# Altium PCB Grabber.PCBDOC (part 5 of 5)
Units mil, origin at the board's own origin, x right, y up, seen from the top; angles counter-clockwise.
Board outline 2854.33 x 3937 mil, 4 copper layers (TopLayer, Internal Plane 2, Layer 1, Bottom Layer), stack 60.752 mil thick; 159 components, 116 nets, 684 pads, 241 vias.
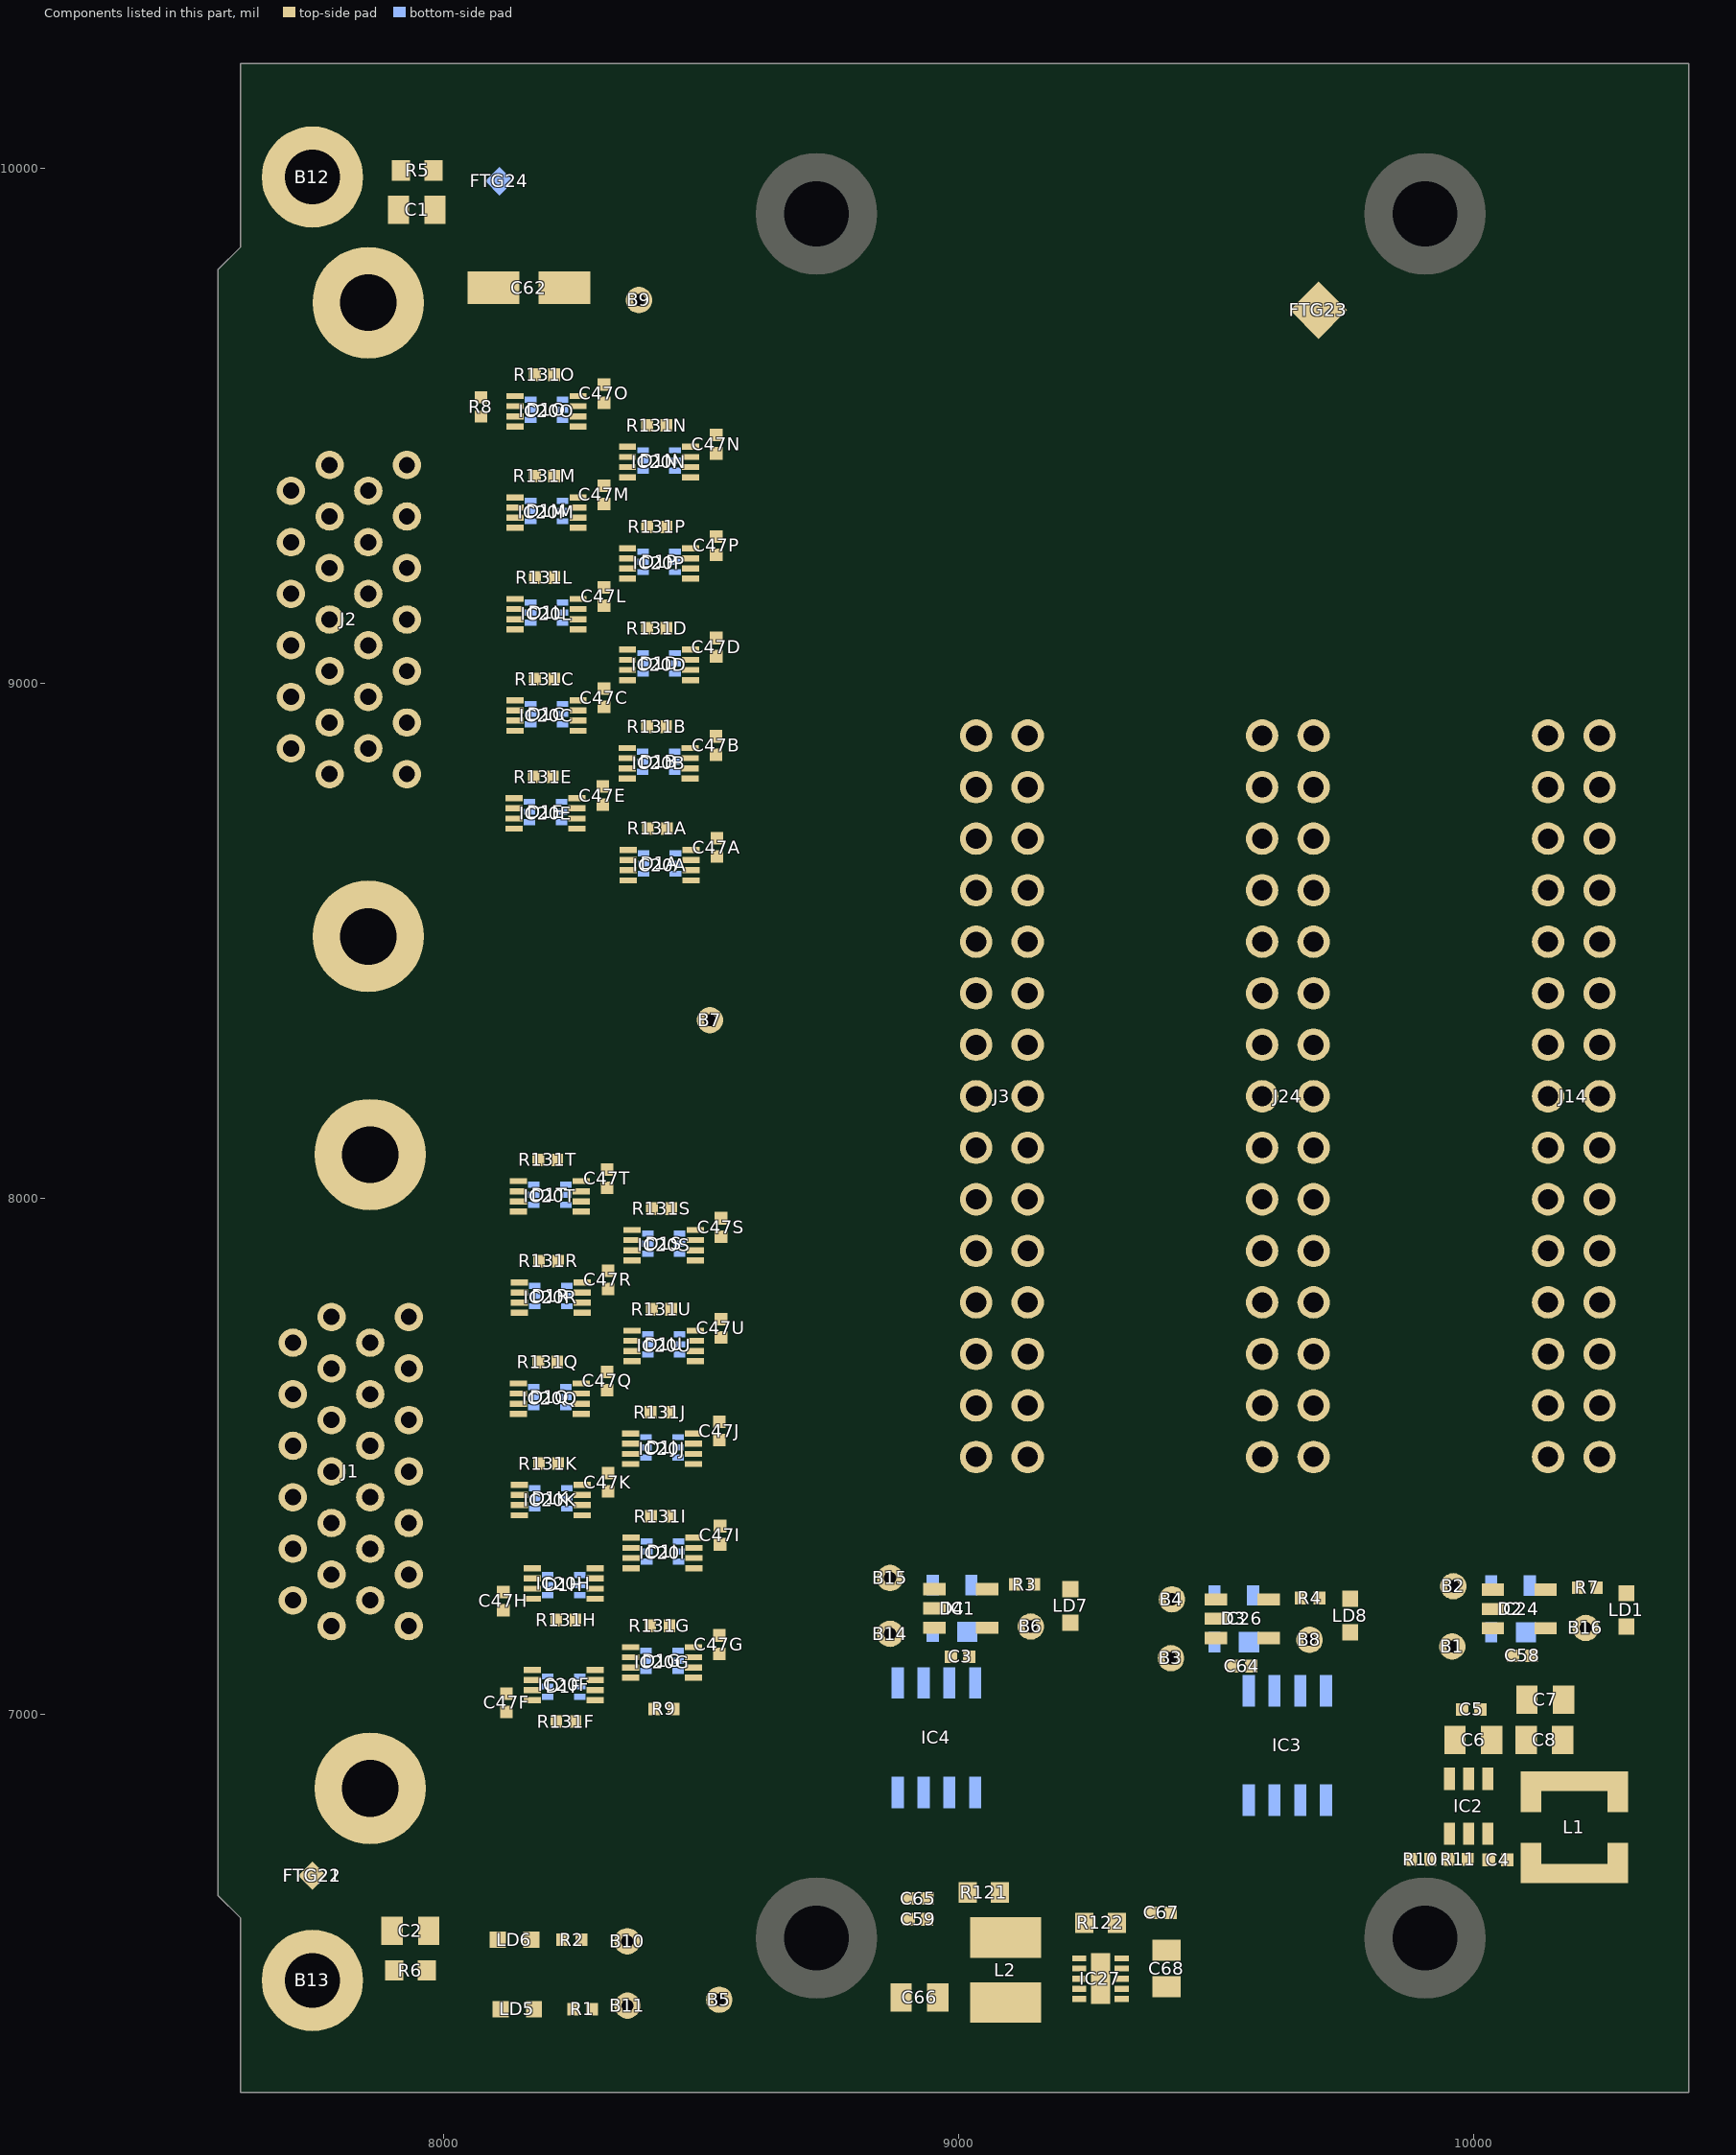
[diagram p6: the components of this part, seen from the top]

## Keep-outs
TopLayer:
  lines w3.94: 7562.69,6585 7655,6585 7674.58,6604.58 7822.23,6604.58 7856,6570.8 ; 7634.23,9885 7667,9885 7686,9866 7806,9866 7846,9906 ; 7846,6385 7846,6426 7859.67,6439.67 7859.67,6490.41 ; 7846,10085 7846,10045.55 7865.53,10026.02 7865.53,10006
Bottom Layer:
  lines w3.94: 7562.69,6585 7655,6585 7674.58,6604.58 7822.23,6604.58 7859.67,6567.13 7859.67,6439.67 7846,6426 7846,6385 ; 7634.23,9885 7667,9885 7686,9866 7806,9866 7865.53,9925.53 7865.53,10026.02 7846,10045.55 7846,10085
KeepOutLayer:
  lines w8: 7562.69,6585 7562.69,9885 ; 7846,6385 10377.65,6385 10377.65,10085 7846,10085

## Other copper
TopLayer:
  rectangle net P3V3: 10288,6856 10324,6882
  rectangle net P3V3: 10183,6882 10210,6904
  rectangle net P12V0: 9842,6918 9894,6995
  rectangle net P12V0: 9865,7525 9937,7618
Bottom Layer:
  rectangle net P12V0: 9842,6918 9894,6995
  rectangle net P12V0: 9865,7525 9937,7618

## Silkscreen, mask and mechanical layers (free items; w line width, h text height)
TopOverlay:
  drawing of 1239 lines, arcs and shapes, not listed
  text "Grabber  v1.1.2" at 8346,10055 h60
  text "GND" at 8445.29,9726.1 h39.37
  text "Y0" at 8160.53,9617.46 h39.37
  text "Y1" at 8388.28,9520.33 h39.37
  text "Y2" at 8160.53,9420.88 h39.37
  text "YCLK" at 8349,9331 h39.37
  text "Y3" at 8160.53,9223.76 h39.37
  text "EEM1" at 9539.07,9137.73 h60
  text "EEM0" at 10088.5,9124.94 h60
  text "EEM2" at 8960.33,9121.98 h60
  text "Z0" at 8374,9118.05 h40
  text "Z1" at 8160.53,9026.91 h40
  text "Z2" at 8378.05,8934.39 h40
  text "ZCLK" at 8114.49,8833.77 h40
  text "Z3" at 8379.43,8736.59 h40
  text "GND" at 8606,8327.02 h39.37
  text "X0" at 8177.06,8095 h39.37
  text "X1" at 8401,8002 h39.37
  text "X2" at 8172,7898 h39.37
  text "XCK" at 8387.7,7803.48 h39.37
  text "LVDS CH0...7 EEM-0" at 10022,7714 h40 r90
  text "X3" at 8166.83,7701.12 h39.37
  text "LVDS CH8...15 EEM-1" at 9449,7701 h40 r90
  text "LVDS CH16...23 EEM-2" at 8888,7694 h40 r90
  text "SERTX" at 8461.12,7596 h39.37
  text "SERRX" at 8079.93,7507 h39.37
  text "CC0" at 8375,7400 h39.37
  text "CC2" at 8371.36,7189.31 h39.37
  text "CC1" at 8194,7124.23 h39.37
  text "MP2" at 9153,7079 h39.37
  text "MP0" at 10210,7073 h39.37
  text "MP1" at 9695,7060 h39.37
  text "CC3" at 8184,6923 h39.37
  text "3.3V" at 8158.95,6606 h39.37
  text "+3.3" at 8409.74,6562 h40
  text "M1" at 8046,6525.84 h39.37 r90
  text "12V" at 8185,6459 h39.37
  text "M2" at 8046,6436 h39.37 r90
  text "12V" at 8319.39,6348.68 h39.37
  text "GND" at 8489.3,6348.68 h39.37
Bottom Overlay:
  text "Grabber  v1.1.2" at 9374,10058 h60
Mechanical1:
  drawing of 303 lines, arcs and shapes, not listed
  text "Layer" at 10850.23,9072 h60
  text "Name" at 11260.14,9072 h60
  text "Material" at 12299.85,9072 h60
  text "Thickness" at 13159.62,9072 h60
  text "Constant" at 13809.46,9072 h60
  text "Board Layer Stack" at 14379.32,9072 h60
  text "TopOverlay" at 11260.14,8952 h60
  text "TopSolder" at 11260.14,8832 h60
  text "Solder Resist" at 12299.85,8832 h60
  text "0,053mm" at 13159.62,8832 h60
  text "3.5" at 13809.46,8832 h60
  text "1" at 10850.23,8712 h60
  text "TopLayer" at 11260.14,8712 h60
  text "0,036mm" at 13159.62,8712 h60
  text "Dielectric1" at 11260.14,8592 h60
  text "FR-4" at 12299.85,8592 h60
  text "0,200mm" at 13159.62,8592 h60
  text "4.5" at 13809.46,8592 h60
  text "2" at 10850.23,8472 h60
  text "Internal Plane 2" at 11260.14,8472 h60
  text "0,036mm" at 13159.62,8472 h60
  text "Dielectric 4" at 11260.14,8352 h60
  text "1,000mm" at 13159.62,8352 h60
  text "4.5" at 13809.46,8352 h60
  text "3" at 10850.23,8232 h60
  text "Layer 1" at 11260.14,8232 h60
  text "0,036mm" at 13159.62,8232 h60
  text "Dielectric 1" at 11260.14,8112 h60
  text "FR-4" at 12299.85,8112 h60
  text "0,200mm" at 13159.62,8112 h60
  text "4.5" at 13809.46,8112 h60
  text "4" at 10850.23,7992 h60
  text "Bottom Layer" at 11260.14,7992 h60
  text "0,036mm" at 13159.62,7992 h60
  text "Bottom Solder" at 11260.14,7872 h60
  text "Solder Resist" at 12299.85,7872 h60
  text "0,053mm" at 13159.62,7872 h60
  text "3.5" at 13809.46,7872 h60
  text "Bottom Overlay" at 11260.14,7752 h60
Mechanical13:
  lines w3.94: 7505.84,6264.5 7505.84,10240.17

## Text inside footprints (layer, text, board x,y; h text height)
J1: TopOverlay "25" at 7727.22,7765.61 h40 r90; TopOverlay "12" at 7877.22,7770.53 h40 r90; TopOverlay "13" at 7952.22,7820.92 h40 r90; TopOverlay "26" at 7802.22,7816 h40 r90; TopOverlay "14" at 7802.02,7071.51 h40 r90; TopOverlay "15" at 7727.02,7115.61 h40 r90; TopOverlay "2" at 7877.02,7143.17 h40 r90; TopOverlay "1" at 7952.02,7108.91 h40 r90; Mechanical14 "25" at 7727.22,7765.61 h40 r90; Mechanical14 "12" at 7877.22,7770.53 h40 r90; Mechanical14 "13" at 7952.22,7820.92 h40 r90; Mechanical14 "26" at 7802.22,7816 h40 r90; Mechanical14 "14" at 7802.02,7071.51 h40 r90; Mechanical14 "15" at 7727.02,7115.61 h40 r90; Mechanical14 "2" at 7877.02,7143.17 h40 r90; Mechanical14 "1" at 7952.02,7108.91 h40 r90
J2: TopOverlay "25" at 7723.48,9419.15 h40 r90; TopOverlay "12" at 7873.48,9424.07 h40 r90; TopOverlay "13" at 7948.48,9474.46 h40 r90; TopOverlay "26" at 7798.48,9469.54 h40 r90; TopOverlay "14" at 7798.28,8725.06 h40 r90; TopOverlay "15" at 7723.28,8769.15 h40 r90; TopOverlay "2" at 7873.28,8796.71 h40 r90; TopOverlay "1" at 7948.28,8762.46 h40 r90; Mechanical14 "25" at 7723.48,9419.15 h40 r90; Mechanical14 "12" at 7873.48,9424.07 h40 r90; Mechanical14 "13" at 7948.48,9474.46 h40 r90; Mechanical14 "26" at 7798.48,9469.54 h40 r90; Mechanical14 "14" at 7798.28,8725.06 h40 r90; Mechanical14 "15" at 7723.28,8769.15 h40 r90; Mechanical14 "2" at 7873.28,8796.71 h40 r90; Mechanical14 "1" at 7948.28,8762.46 h40 r90
J3: TopOverlay "30" at 9189,7524 h40 r270; Mechanical14 "30" at 9189,7524 h40 r270
J14: TopOverlay "30" at 10299,7524 h40 r270; Mechanical14 "30" at 10299,7524 h40 r270
J24: TopOverlay "30" at 9744,7524 h40 r270; Mechanical14 "30" at 9744,7524 h40 r270